# Altium PCB PCB1.PcbDoc
Units mm, origin at the board's own origin, x right, y up, seen from the top; angles counter-clockwise.
Board outline 70 x 20 mm, 2 copper layers (Top Layer, Bottom Layer); 6 components, 7 nets, 83 pads, 0 vias.
Unrouted connection lines stored in the file: 8.
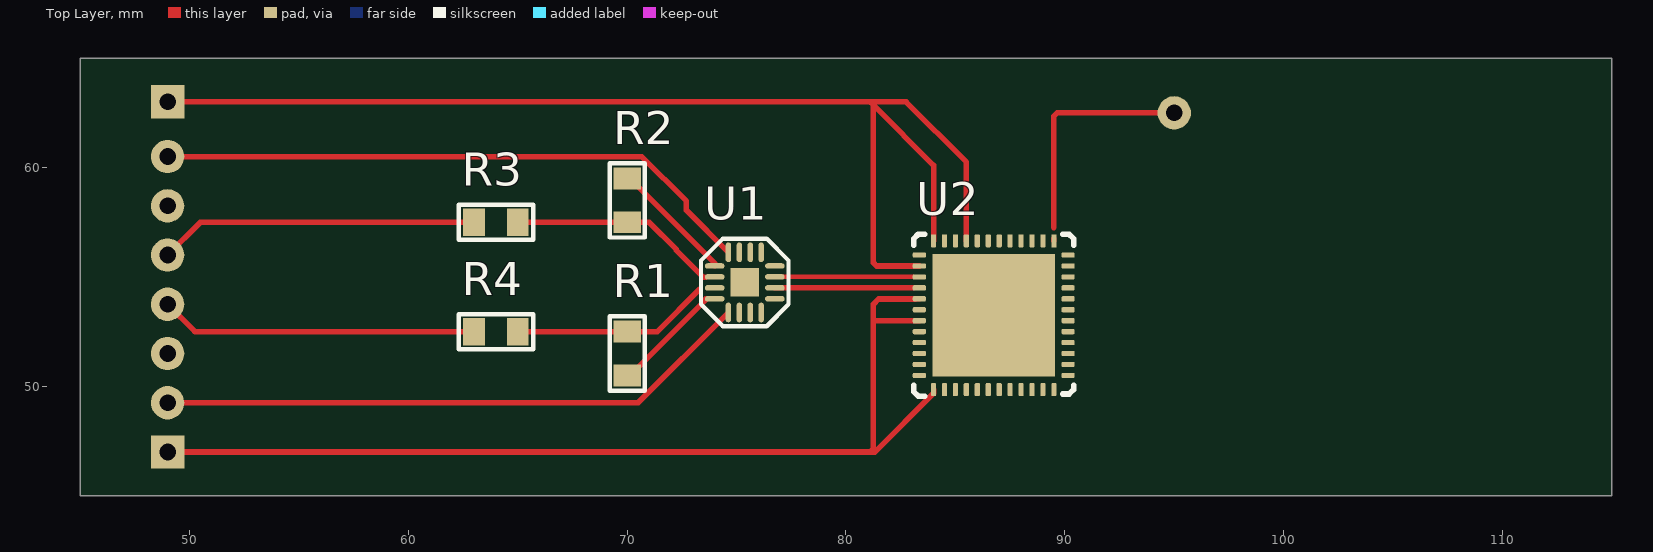
[diagram p0: Top Layer view]
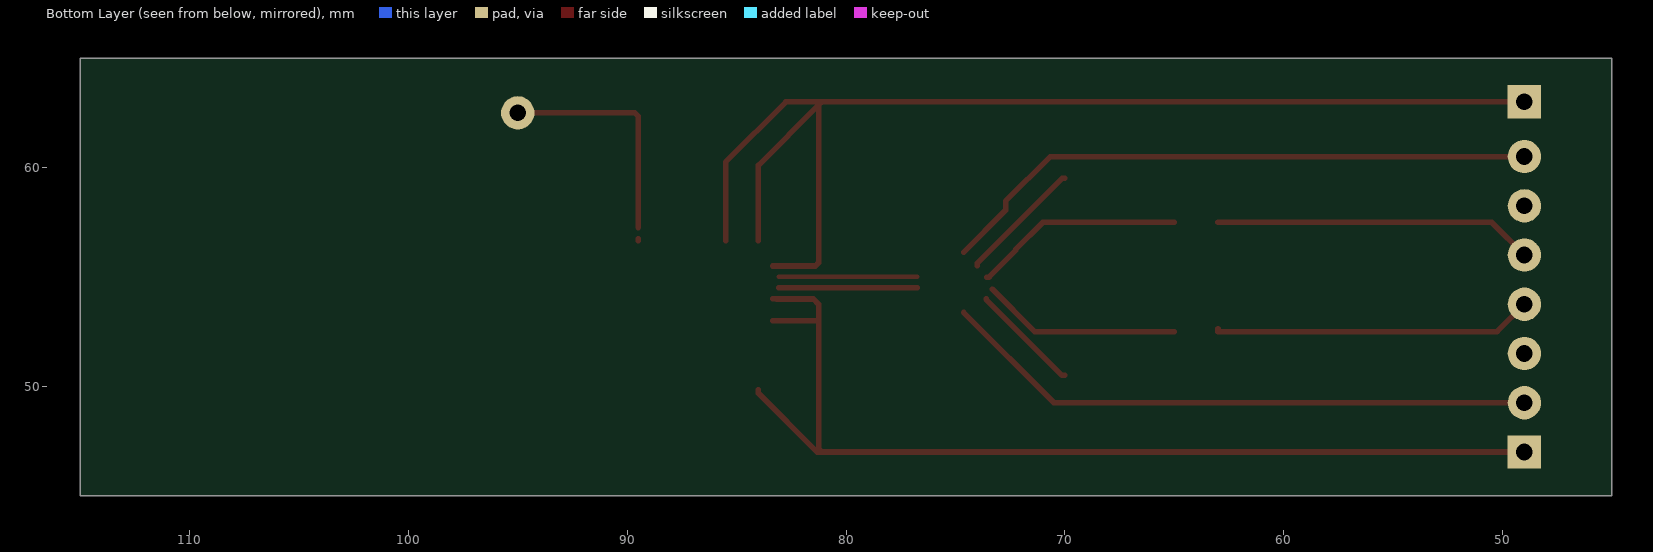
[diagram p1: Bottom Layer view, seen from below]
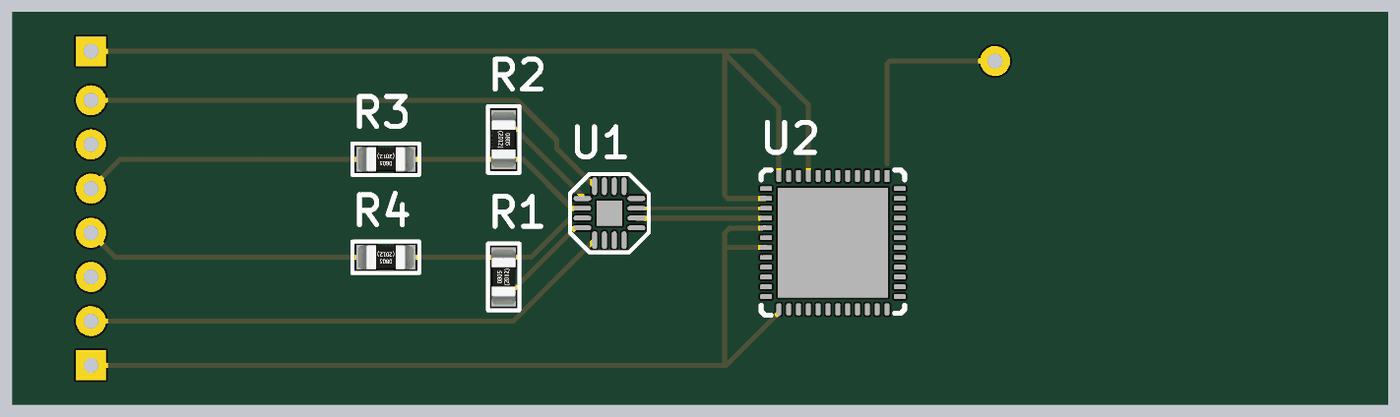
[diagram p2: 3D render of the assembled board from above, using the file's embedded part models]

## Layer stack, top to bottom
Top Solder: solder mask 0.0102, Solder Resist, Dk 3.5
Top Layer: signal copper 0.0356
Dielectric 1: dielectric 0.32, FR-4, Dk 4.8
Bottom Layer: signal copper 0.0356
Bottom Solder: solder mask 0.0102, Solder Resist, Dk 3.5

## Board outline
45,45 115,45 115,65 45,65

## Design rules (kind name [scope] priority, off if disabled: settings)
Clearance [All] p1: gap=0.254 ignorepadtopadclearanceinfootprint=FALSE except(0: Arc-Hole Track-Hole SMDPad-Hole THPad-Hole Via-Hole Fill-Hole Poly-Hole Region-Hole Text-Hole)
PolygonConnect [All] p1: connectstyle=Relief reliefconductorwidth=0.254 reliefentries=4 polygonreliefangle="90 Angle" airgapwidth=0.254
RoomDefinition Sheet1 [InComponentClass('Sheet1')] p1: confinementstyle=ConfineIn formatcopy=TRUE lockcomponents=FALSE outline 60,49.5 93,49.5 93,60.5 60,60.5
RoutingVias [All] p1: holewidth=0.711 width=1.27 viastyle="Through Hole" minholewidth=0.711 minwidth=1.27 maxholewidth=0.711 maxwidth=1.27
SolderMaskExpansion [All] p1: expansion=0.102 istentingtop=FALSE
Width [All] p1: maxlimit=0.254 minlimit=0.254 preferedwidth=0.254
30 further rules are at their usual default settings.

## Components (designator, comment, footprint, x,y, rotation, side; value= is the part's Value field where it differs from the comment)
R1 "" 0805 70,51.5 r90 top
R2 "" 0805 70,58.5 r270 top
R3 "" 0805 64,57.5 r180 top
R4 "" 0805 64,52.5 r180 top
U1 "ADA4932-1" ADA4932-1 75.375,54.75 r0 top
U2 "ADS61B49" ADS61B49 89.5,56.65 r270 top

## Footprints (in the part's own frame and the unit in brackets; to place one, negate y for a bottom-side part, rotate by r counter-clockwise, add the part's x,y. Pads: shape width x height; smd on the part's side, far side on the other; paste and mask are expansions set on the pad)
0805 [mm]
  rect 1x1.25 smd: 1(-1,0) 2(1,0)
  silkscreen extent -1.7,-0.8 1.7,0.8, body extent -1.4,-0.62 1.4,0.63, height 0.8
ADA4932-1 [mm] "ADA4932-1"
  oval 0.9x0.25 smd: 1(-1.375,0.75) 2(-1.375,0.25) 3(-1.375,-0.25) 4(-1.375,-0.75) 9(1.375,-0.75) 10(1.375,-0.25) 11(1.375,0.25) 12(1.375,0.75)
  oval 0.25x0.9 smd: 5(-0.75,-1.375) 6(-0.25,-1.375) 7(0.25,-1.375) 8(0.75,-1.375) 13(0.75,1.375) 14(0.25,1.375) 15(-0.25,1.375) 16(-0.75,1.375)
  rect 1.3x1.3 smd: 17(0,0)
  silkscreen extent -2,-2 2,2
ADS61B49 [mm]
  rect 0.6x0.24 smd: 1(0,0)
  rrect50% 0.6x0.24 smd: 2(0,-0.5) 3(0,-1) 4(0,-1.5) 5(0,-2) 6(0,-2.5) 7(0,-3) 8(0,-3.5) 9(0,-4) 10(0,-4.5) 11(0,-5) 12(0,-5.5) 25(6.8,0) 26(6.8,-0.5) 27(6.8,-1) 28(6.8,-1.5) 29(6.8,-2) 30(6.8,-2.5) 31(6.8,-3) 32(6.8,-3.5) 33(6.8,-4) 34(6.8,-4.5) 35(6.8,-5) 36(6.8,-5.5)
  rrect50% 0.24x0.6 smd: 13(0.65,-6.15) 14(1.15,-6.15) 15(1.65,-6.15) 16(2.15,-6.15) 17(2.65,-6.15) 18(3.15,-6.15) 19(3.65,-6.15) 20(4.15,-6.15) 21(4.65,-6.15) 22(5.15,-6.15) 23(5.65,-6.15) 24(6.15,-6.15) 37(6.15,0.65) 38(5.65,0.65) 39(5.15,0.65) 40(4.65,0.65) 41(4.15,0.65) 42(3.65,0.65) 43(3.15,0.65) 44(2.65,0.65) 45(2.15,0.65) 46(1.65,0.65) 47(1.15,0.65) 48(0.65,0.65)
  rect 5.6x5.6 smd: ""(3.4,-2.75)
  silkscreen extent -0.3,-6.4 7.1,0.9

## Part data
R1 R2 R3 R4: library part Resistor

## Free pads (board coordinates)
  round 1.524 hole 0.762: 1(49,56) 1.8V(49,58.25) 3.3V(49,51.5) +5V(49,60.5) -5V(49,49.25) DGND(95,62.5) "input signal 2"(49,53.75)
  rect 1.524x1.524 hole 0.762: AGND(49,63) GND(49,47)

## Nets (pads, with @x,y where several pads share a name; then routed paths per layer and width w, separated by ;. In a path a pad name is that pad's centre, name@x,y a point inside that pad or via, vN(x,y) a via of type N, cw(c..) or ccw(c..) an arc to the next point about the centre after c; other vN are vias at no path point)
Input_Signal: "pad.input signal 2" pad.1 pad.+5V pad.-5V pad.AGND pad.DGND pad.GND R3.2 R4.2 U1.5 U1.16 U2.1 U2.9 U2.12 U2.14 U2.17 U2.19 U2.36 | length 200.5
  Top Layer w0.254: pad.GND 81.101,47 ; pad.-5V 70.5,49.25 U1.5 ; 49,53.75 50.25,52.5 R4.2 R4.2@63,52.625 ; pad.1 50.5,57.5 R3.2 ; pad.+5V 70.664,60.5 72.703,58.461 72.703,58.047 U1.16 ; pad.AGND 81.101,63 ; U2.19 81.25,53 ; U2.17 83.184,54 83.176,53.992 81.492,53.992 81.25,53.75 81.25,53 ; U2.14 81.399,55.5 81.25,55.649 81.25,62.851 ; U2.36 84,49.684 81.316,47 81.101,47 ; U2.12 84,60.101 81.25,62.851 ; U2.9 85.5,60.25 82.75,63 81.101,63 ; 89.5,57.258 89.5,62.351 89.649,62.5 pad.DGND ; 81.101,47 81.25,47.149 81.25,53 ; 81.101,63 81.25,62.851
NetR1_1: R1.1 U1.4 | length 5.1
  Top Layer w0.254: R1.1 70.125,50.5 73.597,53.972 U1.4@73.597,54
NetR1_2: R1.2 R4.1 U1.3 | length 9.1
  Top Layer w0.254: R4.1 R1.2 71.379,52.5 73.314,54.436
NetR2_1: R2.1 U1.1 | length 5.7
  Top Layer w0.254: R2.1 70.125,59.5 73.994,55.631 U1.1@73.994,55.506
NetR2_2: R2.2 R3.1 U1.2 | length 9.6
  Top Layer w0.254: R3.1 R2.2 71.006,57.5 72.236,56.27 72.236,56.224 73.465,54.994 U1.2@73.565,54.994
NetU1_10: U1.10 U2.16 | length 6.3
  Top Layer w0.254: U1.10 U2.16@83.08,54.5
NetU1_11: U1.11 U2.15 | length 6.3
  Top Layer w0.2: U1.11 U2.15@83.08,55
pads on no net: U1.6 U1.7 U1.8 U1.9 U1.12 U1.13 U1.14 U1.15 U1.17 U2. U2.2 U2.3 U2.4 U2.5 U2.6 U2.7 U2.8 U2.10 U2.11 U2.13 U2.18 U2.20 U2.21 U2.22 U2.23 U2.24 U2.25 U2.26 U2.27 U2.28 U2.29 U2.30 U2.31 U2.32 U2.33 U2.34 U2.35 U2.37 U2.38 U2.39 U2.40 U2.41 U2.42 U2.43 U2.44 U2.45 U2.46 U2.47 U2.48
copper on no net: | length 0.2
  Top Layer w0.254: 89.5,56.65 89.5,56.75 89.5,56.65

## Silkscreen, mask and mechanical layers (free items; w line width, h text height)
board:
  the board outline again, w0.254